# Altium PCB PCB1.PcbDoc
Units mil, origin at the board's own origin, x right, y up, seen from the top; angles counter-clockwise.
Board outline 3390 x 2760 mil, 2 copper layers (Top Layer, Bottom Layer), stack 60.4 mil thick; 6 components, 16 nets, 170 pads, 19 vias.
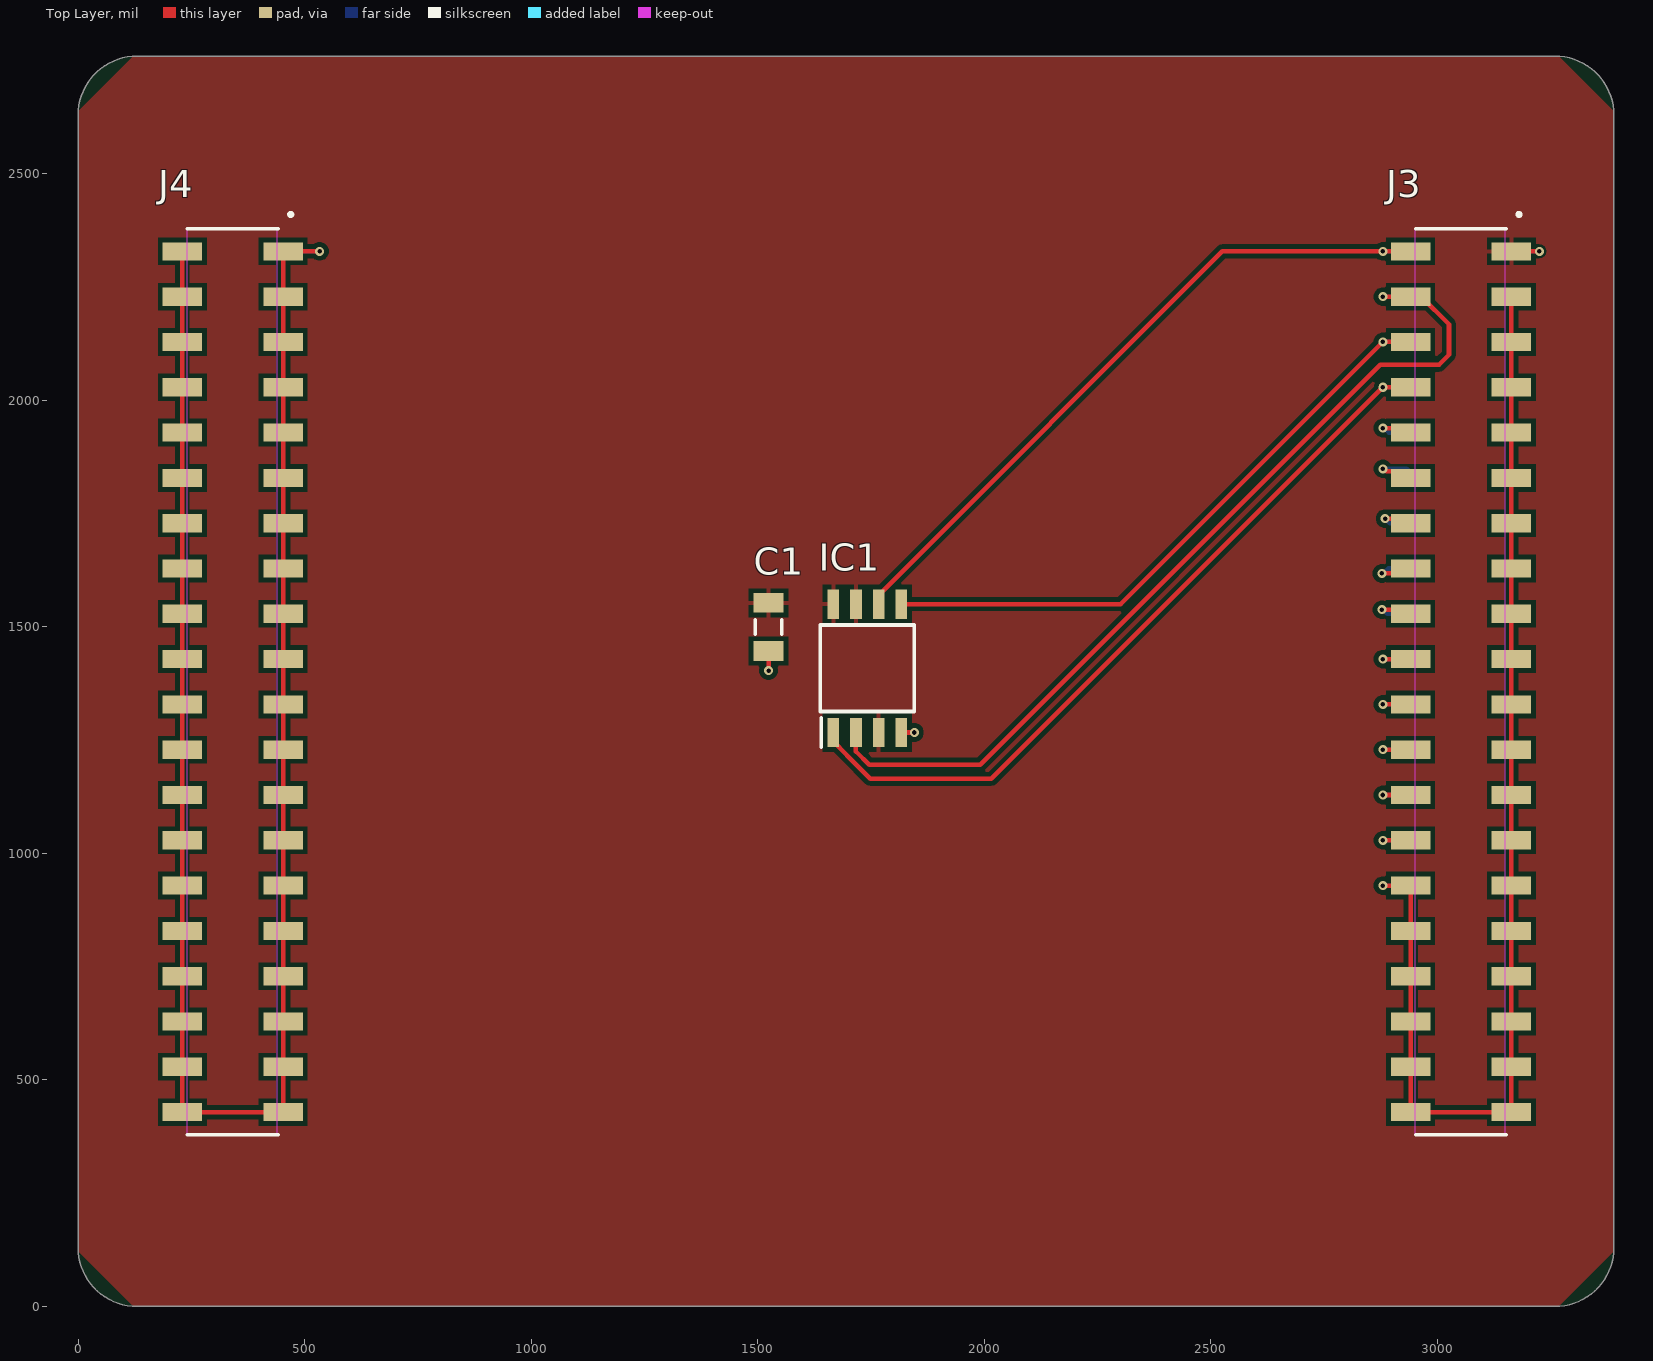
[diagram p0: Top Layer view]
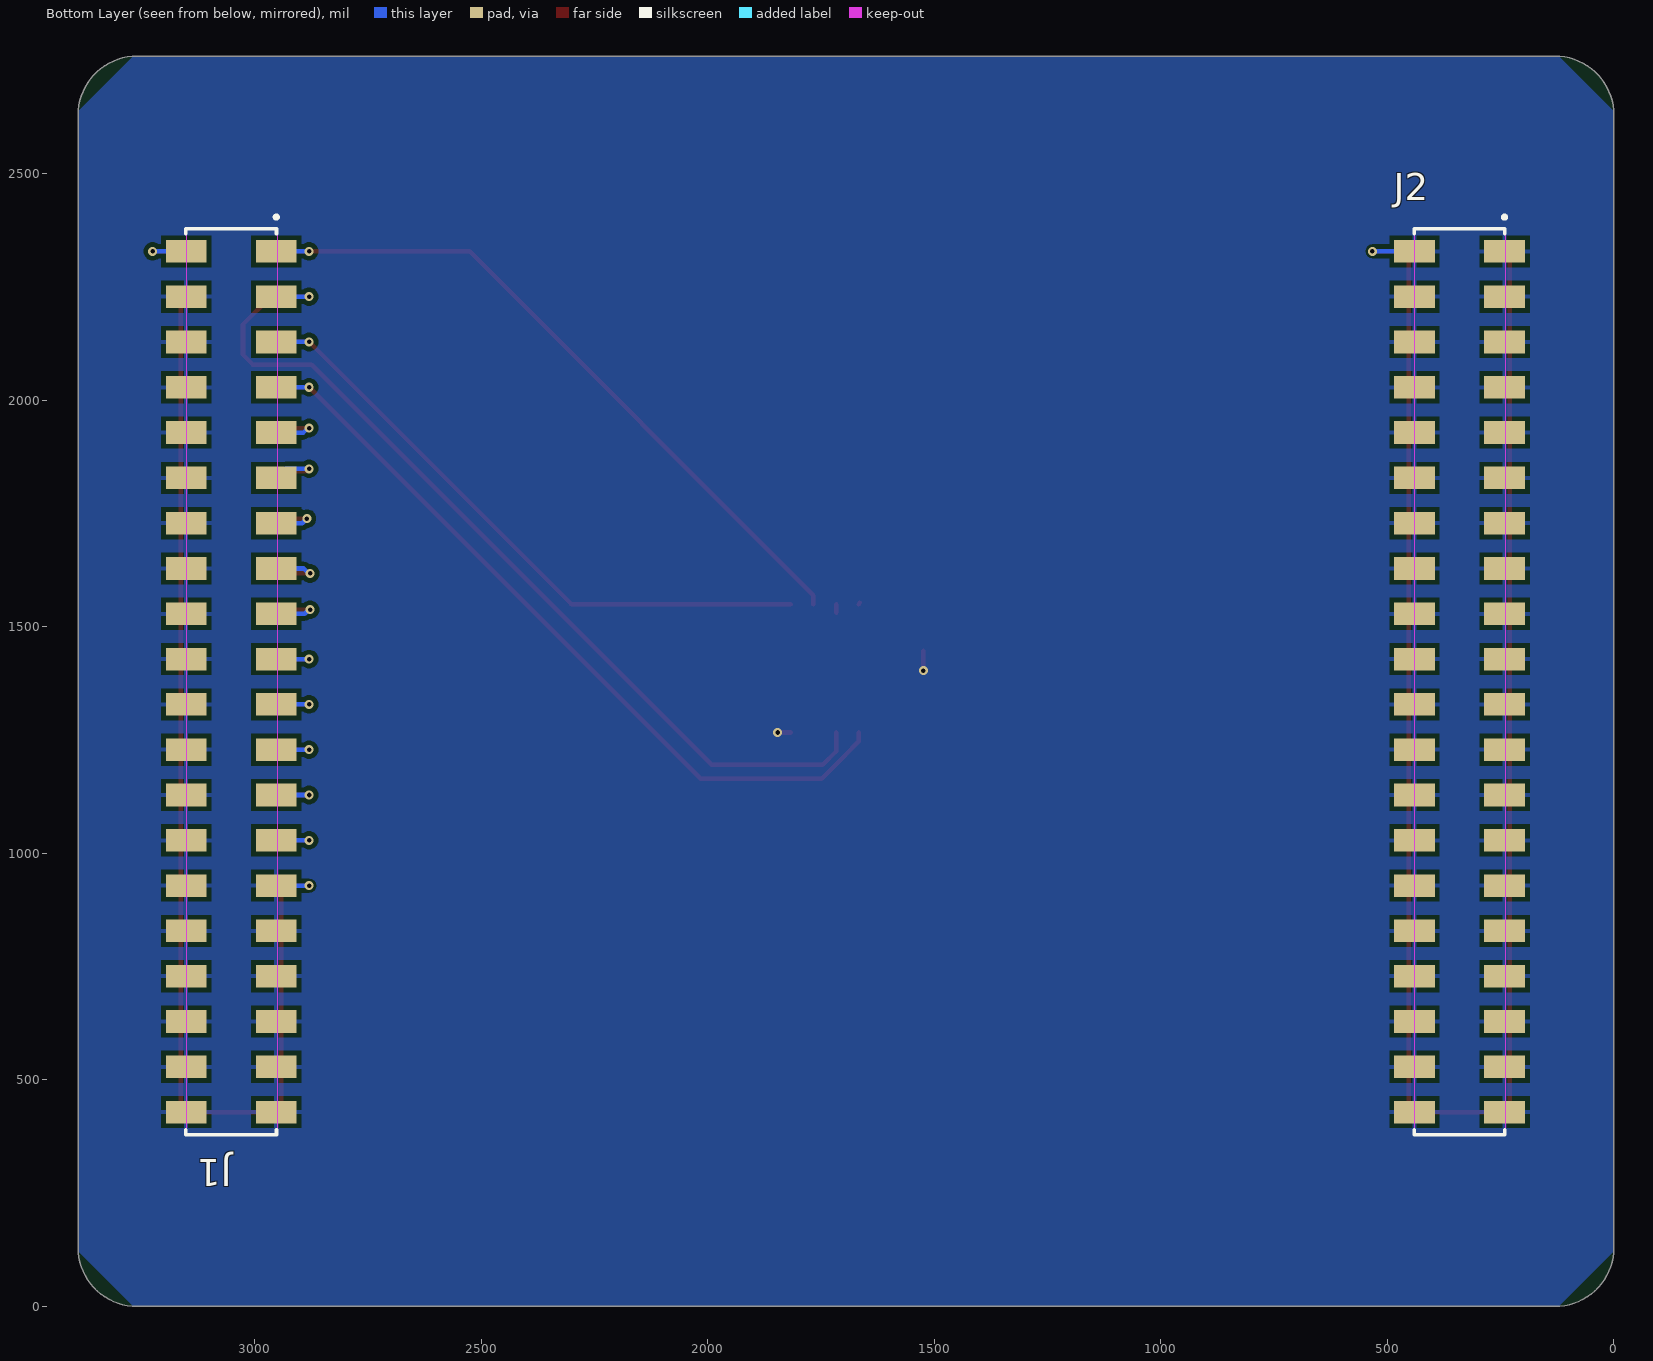
[diagram p1: Bottom Layer view, seen from below]

## Layer stack, top to bottom
Top Solder: solder mask 0.5, Solder Resist, Dk 3.3
Top Layer: signal copper 0.7
Dielectric1: core 59, FR-4, Dk 4.3
Bottom Layer: signal copper 0.7
Bottom Solder: solder mask 0.5, Solder Resist, Dk 3.3

## Board outline
130,0 3260,0 ccw(c3260,130) 3390,130 3390,2630 ccw(c3260,2630) 3260,2760 130,2760 ccw(c130,2630) 0,2630 0,130 ccw(c130,130)

## Design rules (kind name [scope] priority, off if disabled: settings)
Clearance [All] p1: gap=10 ignorepadtopadclearanceinfootprint=FALSE
DiffPairsRouting [All] p1: maxlimit=10 minlimit=10 mostfreqgap=10 toplayer_minwidth=10 toplayer_maxwidth=10 toplayer_prefwidth=10 bottomlayer_minwidth=10 bottomlayer_maxwidth=10 bottomlayer_prefwidth=10 maxuncoupledlength=500
HoleSize [All] p1: absolutevalues=TRUE maxlimit=300 minlimit=10 maxpercent=80.000 minpercent=20.000
MinimumAnnularRing [All] p1: minimumring=5
MinimumSolderMaskSliver [All] p1: minsoldermaskwidth=4.4
PasteMaskExpansion [All] p1: expansion=10
PlaneClearance [All] p1: clearance=15
PlaneConnect [All] p1: pad.planeconnectstyle=Relief pad.reliefexpansion=20 pad.reliefentries=4 pad.reliefconductorwidth=10 pad.reliefairgap=10 via.planeconnectstyle=Direct via.reliefexpansion=20 via.reliefentries=4 via.reliefconductorwidth=10 via.reliefairgap=10
PolygonConnect [All] p1: thpad.connectstyle=Relief thpad.reliefconductorwidth=10 thpad.reliefentries=4 thpad.polygonreliefangle="90 Angle" thpad.airgapwidth=10 smdpad.connectstyle=Relief smdpad.reliefconductorwidth=10 smdpad.reliefentries=4 smdpad.polygonreliefangle="90 Angle" smdpad.airgapwidth=10 via.connectstyle=Direct via.reliefconductorwidth=10 via.reliefentries=4 via.polygonreliefangle="90 Angle" via.airgapwidth=10
RoutingVias [All] p1: holewidth=10 width=20 viastyle="Through Hole" minholewidth=10 minwidth=20 maxholewidth=10 maxwidth=20
SMDNeckDown [All] p1: percent=100.000
SilkToSolderMaskClearance SilkscreenOverComponentPads [IsPad] p1: minsilkscreentomaskgap=9 clearancetoexposedcopper=TRUE
SolderMaskExpansion [All] p1: expansion=10 istentingtop=FALSE
Width [All] p1: maxlimit=10 minlimit=10 preferedwidth=10
23 further rules are at their usual default settings.

## Components (designator, comment, footprint, x,y, rotation, side; value= is the part's Value field where it differs from the comment)
C1 "Cap Semi" C1206 1524,1500 r90 top value=100pF
IC1 "W25Q128JVSIM_TR" SOIC127P790X216-8N 1742,1408.73 r90 top
J1 "HLE-120-02-F-DV" SAMTEC_HLE-120-02-F-DV 3052.03,1379 r90 bottom
J2 "HLE-120-02-F-DV" SAMTEC_HLE-120-02-F-DV 340.79,1379 r90 bottom
J3 "SSM-120-X-DV" SAMTEC_SSM-120-X-DV 3052.62,1379 r90 top
J4 "SSM-120-X-DV" SAMTEC_SSM-120-X-DV 341.38,1379 r90 top

## Footprints (in the part's own frame and the unit in brackets; to place one, negate y for a bottom-side part, rotate by r counter-clockwise, add the part's x,y. Pads: shape width x height; smd on the part's side, far side on the other; paste and mask are expansions set on the pad)
C1206 [mm] "Chip Capacitor, Body 3.2x1.6mm, IPC High Density"
  rect 1.1x1.7 smd: 1(-1.35,0) 2(1.35,0)
  silkscreen extent -0.4,-0.75 0.4,0.75, body extent -1.7,-0.9 1.7,0.9, height 1.3
SAMTEC_HLE-120-02-F-DV [mm]
  rect 1.27x2.29 smd: 01(24.13,-2.525) 02(24.13,2.525) 03(21.59,-2.525) 04(21.59,2.525) 05(19.05,-2.525) 06(19.05,2.525) 07(16.51,-2.525) 08(16.51,2.525) 09(13.97,-2.525) 10(13.97,2.525) 11(11.43,-2.525) 12(11.43,2.525) 13(8.89,-2.525) 14(8.89,2.525) 15(6.35,-2.525) 16(6.35,2.525) 17(3.81,-2.525) 18(3.81,2.525) 19(1.27,-2.525) 20(1.27,2.525) 21(-1.27,-2.525) 22(-1.27,2.525) 23(-3.81,-2.525) 24(-3.81,2.525) 25(-6.35,-2.525) 26(-6.35,2.525) 27(-8.89,-2.525) 28(-8.89,2.525) 29(-11.43,-2.525) 30(-11.43,2.525) 31(-13.97,-2.525) 32(-13.97,2.525) 33(-16.51,-2.525) 34(-16.51,2.525) 35(-19.05,-2.525) 36(-19.05,2.525) 37(-21.59,-2.525) 38(-21.59,2.525) 39(-24.13,-2.525) 40(-24.13,2.525)
  silkscreen extent -25.4,-2.62 26.15,2.54
SAMTEC_SSM-120-X-DV [mm]
  rect 1.02x2.22 smd: 01(24.13,-2.825) 02(24.13,2.825) 03(21.59,-2.825) 04(21.59,2.825) 05(19.05,-2.825) 06(19.05,2.825) 07(16.51,-2.825) 08(16.51,2.825) 09(13.97,-2.825) 10(13.97,2.825) 11(11.43,-2.825) 12(11.43,2.825) 13(8.89,-2.825) 14(8.89,2.825) 15(6.35,-2.825) 16(6.35,2.825) 17(3.81,-2.825) 18(3.81,2.825) 19(1.27,-2.825) 20(1.27,2.825) 21(-1.27,-2.825) 22(-1.27,2.825) 23(-3.81,-2.825) 24(-3.81,2.825) 25(-6.35,-2.825) 26(-6.35,2.825) 27(-8.89,-2.825) 28(-8.89,2.825) 29(-11.43,-2.825) 30(-11.43,2.825) 31(-13.97,-2.825) 32(-13.97,2.825) 33(-16.51,-2.825) 34(-16.51,2.825) 35(-19.05,-2.825) 36(-19.05,2.825) 37(-21.59,-2.825) 38(-21.59,2.825) 39(-24.13,-2.825) 40(-24.13,2.825)
  silkscreen extent -25.4,-3.35 26.3,2.54
SOIC127P790X216-8N [mm]
  rect 1.65x0.65 smd: 1(-3.6,1.905) 2(-3.6,0.635) 3(-3.6,-0.635) 4(-3.6,-1.905) 5(3.6,-1.905) 6(3.6,-0.635) 7(3.6,0.635) 8(3.6,1.905)
  silkscreen extent -4.43,-2.64 2.42,2.64, body extent -3.95,-2.64 3.95,2.64, height 2.16

## Part data
C1: "Capacitor (Semiconductor SIM Model)", LatestRevisionDate=29-May-2009, LatestRevisionNote="IPC-7351 Footprint Added.", PackageDescription="Chip Capacitor", PackageReference=C1206, Published=8-Jun-2000, Publisher="Altium Limited"
IC1: "Integrated Circuit", Manufacturer_Name=Winbond, Manufacturer_Part_Number="W25Q128JVSIM TR", Mouser2 Part Number=454-W25Q128JVSIMTR, Datasheet Link="https://componentsearchengine.com//W25Q128JVSIM TR.pdf", Height=2.16mm, Mouser2 Price/Stock=https://www.mouser.com/Search/Refine.aspx?Keyword=454-W25Q128JVSIMTR
J1 J2: "40 Position Receptacle, Bottom Entry Connector Surface Mount", Package=None, Availability="In Stock", Check_prices=https://www.snapeda.com/parts/HLE-120-02-F-DV/Samtec+Inc./view-part/?ref=eda, MF=Samtec, MP=HLE-120-02-F-DV, Price=None, Purchase-URL=https://pricing.snapeda.com/search/part/HLE-120-02-F-DV/?ref=eda, SnapEDA_Link=https://www.snapeda.com/parts/HLE-120-02-F-DV/Samtec+Inc./view-part/?ref=snap
J3 J4: Package=None, Availability=Unavailable, MF=Samtec, MP=SSM-120-X-DV, Price=None

## Via types
v1: diameter 20, hole 10, Top Layer to Bottom Layer, 19 vias

## Nets (pads, with @x,y where several pads share a name; then routed paths per layer and width w, separated by ;. In a path a pad name is that pad's centre, name@x,y a point inside that pad or via, vN(x,y) a via of type N, cw(c..) or ccw(c..) an arc to the next point about the centre after c; other vN are vias at no path point)
GND: C1.1 IC1.4 J1.04 J1.06 J1.08 J1.10 J1.12 J1.14 J1.16 J1.18 J1.20 J1.22 J1.24 J1.26 J1.28 J1.29 J1.30 J1.31 J1.32 J1.33 J1.34 J1.35 J1.36 J1.37 J1.38 J1.39 J1.40 J2.01 J2.02 J2.03 J2.04 J2.05 J2.06 J2.07 J2.08 J2.09 J2.10 J2.11 J2.12 J2.13 J2.14 J2.15 J2.16 J2.17 J2.18 J2.19 J2.20 J2.21 J2.22 J2.23 J2.24 J2.25 J2.26 J2.27 J2.28 J2.29 J2.30 J2.31 J2.32 J2.33 J2.34 J2.35 J2.36 J2.37 J2.38 J2.39 J2.40 J3.03 J3.05 J3.07 J3.09 J3.11 J3.13 J3.15 J3.17 J3.19 J3.21 J3.23 J3.25 J3.27 J3.29 J3.30 J3.31 J3.32 J3.33 J3.34 J3.35 J3.36 J3.37 J3.38 J3.39 J3.40 J4.01 J4.02 J4.03 J4.04 J4.05 J4.06 J4.07 J4.08 J4.09 J4.10 J4.11 J4.12 J4.13 J4.14 J4.15 J4.16 J4.17 J4.18 J4.19 J4.20 J4.21 J4.22 J4.23 J4.24 J4.25 J4.26 J4.27 J4.28 J4.29 J4.30 J4.31 J4.32 J4.33 J4.34 J4.35 J4.36 J4.37 J4.38 J4.39 J4.40 | length 6924.6
  Top Layer w10: J4.02 J4.04 J4.06 J4.08 J4.10 J4.12 J4.14 J4.16 J4.18 J4.20 J4.22 J4.24 J4.26 J4.28 J4.30 J4.32 J4.34 J4.36 J4.38 J4.40 J4.39 J4.37 J4.35 J4.33 J4.31 J4.29 J4.27 J4.25 J4.23 J4.21 J4.19 J4.17 J4.15 J4.13 J4.11 J4.09 J4.07 J4.05 J4.03 J4.01 v1(533,2329) ; v1(1524,1403.48) C1.1 ; IC1.4 v1(1845.94,1267) ; v1(2879.91,929) J3.30 J3.32 J3.34 J3.36 J3.38 J3.40 J3.39 J3.37 J3.35 J3.33 J3.31 J3.29 J3.27 J3.25 J3.23 J3.21 J3.19 J3.17 J3.15 J3.13 J3.11 J3.09 J3.07 J3.05 J3.03
  Bottom Layer w10: J2.02 v1(533,2329) ; v1(2879.91,929) J1.29
NetIC1_1: IC1.1 J1.07 J3.08 | length 1759.1
  Top Layer w10: IC1.1 1667,1247.31 1697,1217.31 1697,1216.72 1748.72,1165 2015.91,1165 v1(2879.91,2029) J3.08
  Bottom Layer w10: v1(2879.91,2029) J1.07
NetIC1_2: IC1.2 J1.03 J3.04 | length 2051.1
  Top Layer w10: IC1.2 1717,1225 1746,1196 1991,1196 2874,2079 3004,2079 3026,2101 3026,2168.02 2965.02,2229 J3.04 v1(2879.91,2229) v1@2881.41,2227.5
  Bottom Layer w10: v1(2879.91,2229) J1.03
NetIC1_5: IC1.5 J1.05 J3.06 | length 1436.8
  Top Layer w10: IC1.5 2301.37,1550.46 v1(2879.91,2129) J3.06
  Bottom Layer w10: v1(2879.91,2129) J1.05
NetIC1_6: IC1.6 J1.01 J3.02 | length 1581.1
  Top Layer w10: IC1.6 1767,1570.15 2525.85,2329 v1(2879.91,2329) J3.02
  Bottom Layer w10: v1(2879.91,2329) J1.01
NetJ1_09: J1.09 J3.10 | length 142.5
  Top Layer w10: v1(2879.91,1939) 2931.4,1939 J3.10
  Bottom Layer w10: v1(2879.91,1939) 2882.54,1939 2892.54,1929 J1.09
NetJ1_11: J1.11 J3.12 | length 150.8
  Top Layer w10: v1(2879.91,1849) 2882.61,1849 2887.53,1844.08 2926.32,1844.08 J3.12
  Bottom Layer w10: v1(2879.91,1849) 2932.62,1849 J1.11
NetJ1_13: J1.13 J3.14 | length 132.5
  Top Layer w10: v1(2884.91,1739) 2931.4,1739 J3.14
  Bottom Layer w10: v1(2884.91,1739) 2885.39,1739 2895.39,1729 J1.13
NetJ1_15: J1.15 J3.16 | length 147.1
  Top Layer w10: v1(2878,1618) 2930.4,1618 J3.16
  Bottom Layer w10: v1(2878,1618) 2880.71,1618 2891.71,1629 J1.15
NetJ1_17: J1.17 J3.18 | length 145.5
  Top Layer w10: v1(2878,1538) 2932.4,1538 J3.18
  Bottom Layer w10: v1(2878,1538) 2880.71,1538 2889.71,1529 J1.17
NetJ1_19: J1.19 J3.20 | length 134.2
  Top Layer w10: v1(2879.91,1429) J3.20
  Bottom Layer w10: v1(2879.91,1429) J1.19
NetJ1_21: J1.21 J3.22 | length 134.2
  Top Layer w10: v1(2879.91,1329) J3.22
  Bottom Layer w10: v1(2879.91,1329) J1.21
NetJ1_23: J1.23 J3.24 | length 134.2
  Top Layer w10: v1(2879.91,1229) J3.24
  Bottom Layer w10: v1(2879.91,1229) J1.23
NetJ1_25: J1.25 J3.26 | length 134.2
  Top Layer w10: v1(2879.91,1129) J3.26
  Bottom Layer w10: v1(2879.91,1129) J1.25
NetJ1_27: J1.27 J3.28 | length 134.2
  Top Layer w10: v1(2879.91,1029) J3.28
  Bottom Layer w10: v1(2879.91,1029) J1.27
VCC: C1.2 IC1.3 IC1.7 IC1.8 J1.02 J3.01 | length 182.5
  Top Layer w10: IC1.8@1664.32,1553.15 IC1.8 ; IC1.7@1717,1530.78 IC1.7 ; J3.01@3140.22,2329 J3.01 v1(3225.34,2329)
  Bottom Layer w10: J1.02 v1(3225.34,2329)

## Polygon pours and split planes (outlines as drawn)
VCC on Top Layer "VCC_L01_P001" (solid, pour order 1): 121.48,2760 0,2638.52 0,121.48 121.48,0 3268.52,0 3390,121.48 3390,2638.52 3268.52,2760 121.48,2760
GND on Bottom Layer "GND_L02_P002" (solid, pour order 2): 121.48,2760 0,2638.52 0,121.48 121.48,0 3268.52,0 3390,121.48 3390,2638.52 3268.52,2760 121.48,2760

## Keep-outs
Keep-Out Layer:
  rectangle: 240,380 440,2380
  rectangle: 2950,380 3150,2380